# EAGLE board CT_schematic (EAGLE 7.6.0)

Size 100 x 80 mm. Coordinates in mm from the lower left corner, seen from the top.
Outline: 0,0 100,0 100,80 0,80 0,0
Copper layers (1*16): Top 0.035mm / dielectric 1.5mm / Bottom 0.035mm
Design rules "default": minimum track width 10mil, minimum drill 24mil, track to track 8mil, track to pad 8mil, pad to pad 8mil, via to via 8mil, smd to smd 8mil, copper to edge 40mil, drill to drill 8mil, minimum pad ring 10mil, minimum via ring 8mil, stop-mask expansion 4mil, vias tented up to drill 0mil, thermal gap 10mil

## Footprints (pad centres in the part's own frame; a part is rotated, then mirrored left to right if it is on the bottom)
C0603 = smd 0.8 x 0.8: 1 -0.762,0; 2 0.762,0
C0402 = smd 0.5 x 0.5: 1 -0.508,0; 2 0.508,0
C0805 = smd 1.2 x 1.3: 1 -1.016,0; 2 1.016,0
C1210 = smd 1.2 x 2.5: 1 -1.524,0; 2 1.524,0
EXV-9H = smd 3.505 x 1.676: 1 -2.857,0; 2 2.857,0
L0603 = smd 0.8 x 0.8: 1 -0.762,0; 2 0.762,0
L1210 = smd 1.2 x 2.5: 1 -1.524,0; 2 1.524,0
PJ-037B_PACKAGE = drill 3.7 square: 1 12,0 | drill 3.2 square: 2 6,0
R0603 = smd 0.8 x 0.8: 1 -0.762,0; 2 0.762,0
LQFP144 = smd 0.35 x 1.35: 1 -8.75,-10.625; 2 -8.25,-10.625; 3 -7.75,-10.625; 4 -7.25,-10.625; 5 -6.75,-10.625; 6 -6.25,-10.625; 7 -5.75,-10.625; 8 -5.25,-10.625; 9 -4.75,-10.625; 10 -4.25,-10.625; 11 -3.75,-10.625; 12 -3.25,-10.625; 13 -2.75,-10.62; 14 -2.25,-10.625; 15 -1.75,-10.625; 16 -1.25,-10.625; 17 -0.75,-10.625; 18 -0.25,-10.625; 19 0.25,-10.625; 20 0.75,-10.625; 21 1.25,-10.625; 22 1.75,-10.625; 23 2.25,-10.625; 24 2.75,-10.62; 25 3.25,-10.625; 26 3.75,-10.625; 27 4.25,-10.625; 28 4.75,-10.625; 29 5.25,-10.625; 30 5.75,-10.625; 31 6.25,-10.625; 32 6.75,-10.625; 33 7.25,-10.625; 34 7.75,-10.625; 35 8.25,-10.625; 36 8.75,-10.625; 73 8.75,10.625; 74 8.25,10.625; 75 7.75,10.625; 76 7.25,10.625; 77 6.75,10.625; 78 6.25,10.625; 79 5.75,10.625; 80 5.25,10.625; 81 4.75,10.625; 82 4.25,10.625; 83 3.75,10.625; 84 3.25,10.625; 85 2.75,10.625; 86 2.25,10.625; 87 1.75,10.625; 88 1.25,10.625; 89 0.75,10.625; 90 0.25,10.625; 91 -0.25,10.625; 92 -0.75,10.625; 93 -1.25,10.625; 94 -1.75,10.625; 95 -2.25,10.625; 96 -2.75,10.625; 97 -3.25,10.625; 98 -3.75,10.625; 99 -4.25,10.625; 100 -4.75,10.625; 101 -5.25,10.625; 102 -5.75,10.625; 103 -6.25,10.625; 104 -6.75,10.625; 105 -7.25,10.625; 106 -7.75,10.625; 107 -8.25,10.625; 108 -8.75,10.625 | smd 1.35 x 0.35: 37 10.625,-8.75; 38 10.625,-8.25; 39 10.625,-7.75; 40 10.625,-7.25; 41 10.625,-6.75; 42 10.625,-6.25; 43 10.625,-5.75; 44 10.625,-5.25; 45 10.625,-4.75; 46 10.625,-4.25; 47 10.625,-3.75; 48 10.625,-3.25; 49 10.625,-2.75; 50 10.625,-2.25; 51 10.625,-1.75; 52 10.625,-1.25; 53 10.625,-0.75; 54 10.625,-0.25; 55 10.625,0.25; 56 10.625,0.75; 57 10.625,1.25; 58 10.625,1.75; 59 10.625,2.25; 60 10.625,2.75; 61 10.625,3.25; 62 10.625,3.75; 63 10.625,4.25; 64 10.625,4.75; 65 10.625,5.25; 66 10.625,5.75; 67 10.625,6.25; 68 10.625,6.75; 69 10.625,7.25; 70 10.625,7.75; 71 10.625,8.25; 72 10.625,8.75; 109 -10.625,8.75; 110 -10.625,8.25; 111 -10.625,7.75; 112 -10.625,7.25; 113 -10.625,6.75; 114 -10.625,6.25; 115 -10.625,5.75; 116 -10.625,5.25; 117 -10.625,4.75; 118 -10.625,4.25; 119 -10.625,3.75; 120 -10.625,3.25; 121 -10.625,2.75; 122 -10.625,2.25; 123 -10.625,1.75; 124 -10.625,1.25; 125 -10.625,0.75; 126 -10.625,0.25; 127 -10.625,-0.25; 128 -10.625,-0.75; 129 -10.625,-1.25; 130 -10.625,-1.75; 131 -10.625,-2.25; 132 -10.625,-2.75; 133 -10.625,-3.25; 134 -10.625,-3.75; 135 -10.625,-4.25; 136 -10.625,-4.75; 137 -10.625,-5.25; 138 -10.625,-5.75; 139 -10.625,-6.25; 140 -10.625,-6.75; 141 -10.625,-7.25; 142 -10.625,-7.75; 143 -10.625,-8.25; 144 -10.625,-8.75
SOIC-8 = smd 1.6 x 0.6: 1 -2.7,1.905 | smd 1.55 x 0.6: 2 -2.7,0.635; 3 -2.7,-0.635; 4 -2.7,-1.905; 5 2.7,-1.905; 6 2.7,-0.635; 7 2.7,0.635; 8 2.7,1.905
SAMTEC_FTSH-105-01-L-DV-K = smd 0.762 x 2.794: 1 -2.54,-2.032; 2 -2.54,2.032; 3 -1.27,-2.032; 4 -1.27,2.032; 5 0,-2.032; 6 0,2.032; 7 1.27,-2.032; 8 1.27,2.032; 9 2.54,-2.032; 10 2.54,2.032
SSOP-20 = smd 1.651 x 0.432: 1 -3.48,2.925; 2 -3.48,2.275; 3 -3.48,1.625; 4 -3.48,0.975; 5 -3.48,0.325; 6 -3.48,-0.325; 7 -3.48,-0.975; 8 -3.48,-1.625; 9 -3.48,-2.275; 10 -3.48,-2.925; 11 3.48,-2.925; 12 3.48,-2.275; 13 3.48,-1.625; 14 3.48,-0.975; 15 3.48,-0.325; 16 3.48,0.325; 17 3.48,0.975; 18 3.48,1.625; 19 3.48,2.275; 20 3.48,2.925
182-009-MALE = drill 1.194 pad 1.524 octagon: 1 -5.537,10.923; 2 -2.769,10.923; 3 0,10.923; 4 2.769,10.923; 5 5.537,10.923; 6 -4.153,8.08; 7 -1.384,8.08; 8 1.384,8.08; 9 4.153,8.08 | hole 3.048: -12.446,9.501; 12.446,9.501
SSOP-28 = smd 1.5 x 0.4: 1 -3.625,4.225; 2 -3.625,3.575; 3 -3.625,2.925; 4 -3.625,2.275; 5 -3.625,1.625; 6 -3.625,0.975; 7 -3.625,0.325; 8 -3.625,-0.325; 9 -3.625,-0.975; 10 -3.625,-1.625; 11 -3.625,-2.275; 12 -3.625,-2.925; 13 -3.625,-3.575; 14 -3.625,-4.225; 15 3.625,-4.225; 16 3.625,-3.575; 17 3.625,-2.925; 18 3.625,-2.275; 19 3.625,-1.625; 20 3.625,-0.975; 21 3.625,-0.325; 22 3.625,0.325; 23 3.625,0.975; 24 3.625,1.625; 25 3.625,2.275; 26 3.625,2.925; 27 3.625,3.575; 28 3.625,4.225
TH58NVG3S0HBAI4 = smd 0.46 x 0.46: A1 -5.6,2.4; A2 -5.6,1.6; A9 -5.6,-5.6; A10 -5.6,-6.4; B1 -4.8,2.4; B9 -4.8,-5.6; B10 -4.8,-6.4; C3 -4,0.8; C4 -3.2,0.8; C5 -2.4,0.8; C6 -1.6,0.8; C7 -0.8,0.8; C8 0,0.8; D3 -4,0; D4 -3.2,0; D5 -2.4,0; D6 -1.6,0; D7 -0.8,0; D8 0,0; E3 -4,-0.8; E4 -3.2,-0.8; E5 -2.4,-0.8; E6 -1.6,-0.8; E7 -0.8,-0.8; E8 0,-0.8; F3 -4,-1.6; F4 -3.2,-1.6; F5 -2.4,-1.6; F6 -1.6,-1.6; F7 -0.8,-1.6; F8 0,-1.6; G3 -4,-2.4; G4 -3.2,-2.4; G5 -2.4,-2.4; G6 -1.6,-2.4; G7 -0.8,-2.4; G8 0,-2.4; H3 -4,-3.2; H4 -3.2,-3.2; H5 -2.4,-3.2; H6 -1.6,-3.2; H7 -0.8,-3.2; H8 0,-3.2; J3 -4,-4; J4 -3.2,-4; J5 -2.4,-4; J6 -1.6,-4; J7 -0.8,-4; J8 0,-4; K3 -4,-4.8; K4 -3.2,-4.8; K5 -2.4,-4.8; K6 -1.6,-4.8; K7 -0.8,-4.8; K8 0,-4.8; L1 0.8,2.4; L2 0.8,1.6; L9 0.8,-5.6; L10 0.8,-6.4; M1 1.6,2.4; M2 1.6,1.6; M9 1.6,-5.6; M10 1.6,-6.4
ABLS-25.000MHZ-B2F-T = smd 5.6 x 2.8: 1 -3.81,0; 2 5.69,0
ASEK = smd 1.4 x 1: 1 -1.1,-0.8; 2 1.1,-0.8; 3 1.1,0.8; 4 -1.1,0.8
WSON-8 = smd 0.3 x 0.6: 1 -0.75,0; 2 0.05,0; 3 0.85,0; 4 1.65,0; 5 1.65,3.8; 6 0.85,3.8; 7 0.05,3.8; 8 -0.75,3.8 | smd 3 x 2.6: PAD 0.45,1.9
SON-6 = smd 0.55 x 0.3: 1 -0.355,0.5 | smd 0.52 x 0.3: 2 -0.37,0; 3 -0.37,-0.5; 4 0.37,-0.5; 5 0.37,0; 6 0.37,0.5
SW_4-1437565-2 = smd 1.4 x 2.1: 1 -2.23,4.55; 2 -2.23,-4.55; 3 2.23,4.55; 4 2.23,-4.55
LGM67K-G1J2-24-Z = smd 0.8 x 1.4: A -2,0; C 0,0
NC7SZ125M5X = smd 1.3 x 0.7: 1 -1.3,0.95; 2 -1.3,0; 3 -1.3,-0.95; 4 1.3,-0.95; 5 1.3,0.95

## Placement (x,y rotation side)
C1  1e-06  [C0603]  -19.05,93.98 0 top  (outside the outline)
C2  1e-07  [C0603]  -22.86,93.98 0 top  (outside the outline)
C3  1e-07  [C0603]  -26.67,93.98 0 top  (outside the outline)
C4  1e-07  [C0603]  -30.48,93.98 0 top  (outside the outline)
C5  1e-07  [C0603]  -34.29,93.98 0 top  (outside the outline)
C6  1e-07  [C0603]  -38.1,93.98 0 top  (outside the outline)
C7  1e-07  [C0603]  -41.91,93.98 0 top  (outside the outline)
C8  1e-07  [C0603]  -45.72,93.98 0 top  (outside the outline)
C9  1e-07  [C0603]  -49.53,93.98 0 top  (outside the outline)
C10  1e-07  [C0603]  -53.34,93.98 0 top  (outside the outline)
C11  1e-07  [C0603]  -57.15,93.98 0 top  (outside the outline)
C12  1e-07  [C0603]  -60.96,93.98 0 top  (outside the outline)
C13  1e-07  [C0603]  -64.77,93.98 0 top  (outside the outline)
C14  4.7e-06  [C0603]  -15.24,93.98 0 top  (outside the outline)
C15  1e-08  [C0603]  -68.58,93.98 0 top  (outside the outline)
C16  1e-08  [C0603]  -72.39,93.98 0 top  (outside the outline)
C17  1e-06  [C0603]  -76.2,93.98 0 top  (outside the outline)
C18  1e-11  [C0402]  -41.91,99.06 0 top  (outside the outline)
C19  1e-11  [C0402]  -45.72,99.06 0 top  (outside the outline)
C20  1e-08  [C0402]  -49.53,99.06 0 top  (outside the outline)
C21  1e-07  [C0402]  -53.34,99.06 0 top  (outside the outline)
C22  1e-06  [C0603]  -80.01,93.98 0 top  (outside the outline)
C23  1e-06  [C0603]  -83.82,93.98 0 top  (outside the outline)
C24  1e-06  [C0603]  -87.63,93.98 0 top  (outside the outline)
C25  4.7e-06  [C0805]  -46.99,82.55 0 top  (outside the outline)
C26  1e-07  [C0402]  -57.15,99.06 0 top  (outside the outline)
C27  1e-07  [C0402]  -60.96,99.06 0 top  (outside the outline)
C28  1e-07  [C0402]  -64.77,99.06 0 top  (outside the outline)
C29  1e-07  [C0402]  -68.58,99.06 0 top  (outside the outline)
C30  1e-07  [C0402]  -72.39,99.06 0 top  (outside the outline)
C31  1e-05  [C0805]  -52.07,82.55 0 top  (outside the outline)
C32  1e-07  [C0402]  -76.2,99.06 0 top  (outside the outline)
C33  1e-07  [C0402]  -80.01,99.06 0 top  (outside the outline)
C34  1e-08  [C0402]  -83.82,99.06 0 top  (outside the outline)
C35  1e-08  [C0402]  -87.63,99.06 0 top  (outside the outline)
C36  1e-05  [C1210]  -16.51,83.82 0 top  (outside the outline)
C37  1e-05  [C1210]  -22.86,83.82 0 top  (outside the outline)
C38  1e-07  [C0402]  -15.24,104.14 0 top  (outside the outline)
C39  0.0001  [EXV-9H]  -38.1,76.2 0 top  (outside the outline)
C40  0.0001  [EXV-9H]  -49.53,76.2 0 top  (outside the outline)
C41  1e-08  [C0402]  -19.05,104.14 0 top  (outside the outline)
C42  1e-08  [C0402]  -22.86,104.14 0 top  (outside the outline)
F1  240.0  [L0603]  -15.24,99.06 0 top  (outside the outline)
I1  1.5e-05  [L1210]  -29.21,83.82 0 top  (outside the outline)
J1  PJ-037B  [PJ-037B_PACKAGE]  -74.93,52.07 0 top  (outside the outline)
R2  1000.0  [R0603]  -19.05,99.06 0 top  (outside the outline)
R4  4700.0  [R0603]  -22.86,99.06 0 top  (outside the outline)
R5  10000.0  [R0603]  -15.24,88.9 0 top  (outside the outline)
R6  10000.0  [R0603]  -20.32,88.9 0 top  (outside the outline)
R7  10000.0  [R0603]  -25.4,88.9 0 top  (outside the outline)
R8  10000.0  [R0603]  -30.48,88.9 0 top  (outside the outline)
R9  10000.0  [R0603]  -35.56,88.9 0 top  (outside the outline)
R10  10000.0  [R0603]  -40.64,88.9 0 top  (outside the outline)
R11  10000.0  [R0603]  -45.72,88.9 0 top  (outside the outline)
R12  10000.0  [R0603]  -50.8,88.9 0 top  (outside the outline)
R13  5.0  [R0603]  -26.67,99.06 0 top  (outside the outline)
R14  100000.0  [R0603]  -57.15,82.55 0 top  (outside the outline)
R15  100000.0  [R0603]  -62.23,82.55 0 top  (outside the outline)
R16  100000.0  [R0603]  -67.31,82.55 0 top  (outside the outline)
R17  100000.0  [R0603]  -72.39,82.55 0 top  (outside the outline)
R18  10000.0  [R0603]  -55.88,88.9 0 top  (outside the outline)
R19  10000.0  [R0603]  -60.96,88.9 0 top  (outside the outline)
R20  10000.0  [R0603]  -66.04,88.9 0 top  (outside the outline)
R21  10000.0  [R0603]  -71.12,88.9 0 top  (outside the outline)
R22  10000.0  [R0603]  -76.2,88.9 0 top  (outside the outline)
R23  100000.0  [R0603]  -77.47,82.55 0 top  (outside the outline)
R24  2231.0  [R0603]  -30.48,99.06 0 top  (outside the outline)
R25  1000.0  [R0603]  -34.29,99.06 0 top  (outside the outline)
R26  10000.0  [R0603]  -81.28,88.9 0 top  (outside the outline)
R27  10000.0  [R0603]  -86.36,88.9 0 top  (outside the outline)
R28  9100.0  [R0603]  -38.1,99.06 0 top  (outside the outline)
R29  680000.0  [R0603]  -82.55,82.55 0 top  (outside the outline)
R30  120000.0  [R0603]  -87.63,82.55 0 top  (outside the outline)
U1  STM32F101ZGTx  [LQFP144]  -24.13,11.43 0 top  (outside the outline)
U2  AT25128B-SSHL-T  [SOIC-8]  -44.45,64.77 0 top  (outside the outline)
U3  FTSH-105-01-L-DV-K  [SAMTEC_FTSH-105-01-L-DV-K]  -35.56,53.34 0 top  (outside the outline)
U4  MAX3218EAP+T  [SSOP-20]  -54.61,64.77 0 top  (outside the outline)
U5  182-009-113R531  [182-009-MALE]  -59.69,6.35 0 top  (outside the outline)
U6  ST3241EBPR  [SSOP-28]  -58.42,30.48 0 top  (outside the outline)
U7  182-009-113R531  [182-009-MALE]  -36.83,29.21 0 top  (outside the outline)
U8  TH58NVG3S0HBAI4  [TH58NVG3S0HBAI4]  -53.34,54.61 0 top  (outside the outline)
U9  ABLS-25.000MHZ-B2F-T  [ABLS-25.000MHZ-B2F-T]  -68.58,76.2 0 top  (outside the outline)
U10  ASEK-32.768KHz-ECST  [ASEK]  -29.21,76.2 0 top  (outside the outline)
U11  LP3878SDX-ADJ/NOPB  [WSON-8]  -77.47,63.5 0 top  (outside the outline)
U12  TPS3895ADRYR  [SON-6]  -25.4,102.87 0 top  (outside the outline)
U13  4-1437565-2  [SW_4-1437565-2]  -27.94,66.04 0 top  (outside the outline)
U14  Q65110A2395  [LGM67K-G1J2-24-Z]  -80.01,74.93 0 top  (outside the outline)
U15  nc7sz125m5x  [NC7SZ125M5X]  -34.29,82.55 0 top  (outside the outline)
U16  nc7sz125m5x  [NC7SZ125M5X]  -40.64,82.55 0 top  (outside the outline)

## Library data of the parts
C1-C42 F1 I1 J1 R2 R4-R30 U1-U16 = circuit_tree

## Nets
CLK_CRYSTAL_U1_23: C18.1 U1.23 U9.1
CLK_CRYSTAL_U1_24: C19.1 U1.24 U9.2
CLK_U1_8: U1.8 U10.3
GND: C1.2 C2.2 C3.2 C4.2 C5.2 C6.2 C7.2 C8.2 C9.2 C10.2 C11.2 C12.2 C13.2 C14.2 C15.2 C16.2 C17.2 C18.2 C19.2 C20.2 C21.2 C22.2 C23.2 C24.2 C26.2 C29.2 C30.2 C31.2 C32.2 C33.2 C34.2 C35.2 C36.2 C37.2 C38.2 C39.2 C40.2 C41.2 C42.2 J1.2 R2.2 R5.2 R12.2 R13.2 R25.2 R28.2 R30.2 U1.16 U1.30 U1.31 U1.38 U1.51 U1.61 U1.71 U1.83 U1.94 U1.107 U1.120 U1.130 U1.143 U2.4 U3.3 U3.5 U4.5 U4.17 U4.20 U5.5 U6.23 U6.25 U7.5 U8.C5 U8.K3 U8.K8 U10.2 U11.3 U11.PAD U12.2 U14.C U15.2 U15.3 U16.1 U16.3
NET_U1_25: R4.1 U1.25 U16.4
NET_U1_33: C15.1 C16.1 C17.1 F1.1 U1.32 U1.33
NET_U1_138: R5.1 U1.138
NET_U1_141: U14.A
NET_U1_142: U13.3 U13.4
NET_U2_3: R6.1 U2.3
NET_U2_7: R8.1 U2.7
NET_U3_2: R11.1 U3.2
NET_U3_9: R13.1 U3.9
NET_U4_1: I1.1 U4.1
NET_U4_2: R14.1 U4.2
NET_U4_3: R15.1 U4.3
NET_U4_4: R16.1 U4.4
NET_U4_15: C24.1 U4.15
NET_U4_16: C25.2 U4.16
NET_U4_18: C25.1 U4.18
NET_U4_19: C23.1 U4.19
NET_U5_2: U4.12 U5.2
NET_U5_3: U4.14 U5.3
NET_U5_7: U4.11 U5.7
NET_U5_8: U4.13 U5.8
NET_U6_1: C28.1 U6.1
NET_U6_2: C28.2 U6.2
NET_U6_3: C30.1 U6.3
NET_U6_22: R17.1 U6.22
NET_U6_24: C27.2 U6.24
NET_U6_27: C29.1 U6.27
NET_U6_28: C27.1 U6.28
NET_U7_2: U6.4 U7.2
NET_U7_3: U6.9 U7.3
NET_U7_7: U6.5 U7.7
NET_U7_8: U6.10 U7.8
NET_U8_C3: R21.1 U8.C3
NET_U8_C8: R22.1 U8.C8
NET_U11_1: C35.1 U11.1
NET_U11_6: R24.2 R25.1 U11.6
NET_U11_8: R23.1 U11.8
NET_U12_1: R27.1 R28.1 U12.1
NET_U12_3: R29.2 R30.1 U12.3
NET_U12_4: R26.1 U12.4 U15.4 U16.2
NET_U13_1: R2.1 U13.1 U13.2
PROC_FSMC_D0: U1.85 U8.H4
PROC_FSMC_D1: U1.86 U8.J4
PROC_FSMC_D2: U1.114 U8.K4
PROC_FSMC_D3: U1.115 U8.K5
PROC_FSMC_D4: U1.58 U8.K6
PROC_FSMC_D5: U1.59 U8.J7
PROC_FSMC_D6: U1.60 U8.K7
PROC_FSMC_D7: U1.63 U8.J8
PROC_FSMC_NCE2: R18.1 U1.123 U8.C6
PROC_FSMC_NOE: R19.1 U1.118 U8.D4
PROC_FSMC_NWE: R20.1 U1.119 U8.C7
PROC_SPI1_MISO: U1.42 U2.2
PROC_SPI1_MOSI: U1.43 U2.5
PROC_SPI1_NSS: R7.1 U1.40 U2.1
PROC_SPI1_SCK: U1.41 U2.6
PROC_SYS_JTDI: R10.1 U1.110 U3.8
PROC_SYS_JTDO_TRACESWO: U1.133 U3.6
PROC_SYS_TRACECLK: R12.1 U1.1 U3.4
PROC_UART4_RX: U1.112 U4.9
PROC_UART4_TX: U1.111 U4.7
PROC_UART5_RX: U1.116 U6.19
PROC_UART5_TX: U1.113 U6.14
RST_OUT_U3_JTAG_RST_B: R9.1 U3.10 U15.1
VCC_S1_14V8: C36.1 C39.1 C40.1 J1.1 R23.2 U11.4
VCC_TIER1_3V3: C1.1 C2.1 C3.1 C4.1 C5.1 C6.1 C7.1 C8.1 C9.1 C10.1 C11.1 C12.1 C13.1 C14.1 C20.1 C21.1 C22.1 C26.1 C31.1 C32.1 C33.1 C34.1 C37.1 C38.1 C41.1 C42.1 F1.2 I1.2 R4.2 R6.2 R7.2 R8.2 R9.2 R10.2 R11.2 R14.2 R15.2 R16.2 R17.2 R18.2 R19.2 R20.2 R21.2 R22.2 R24.1 R26.2 R27.2 R29.1 U1.6 U1.17 U1.39 U1.52 U1.62 U1.72 U1.84 U1.95 U1.108 U1.121 U1.131 U1.144 U2.8 U3.1 U4.6 U6.26 U8.H8 U8.J6 U10.4 U11.5 U12.6 U15.5 U16.5

## Tracks (layer width: path | path; a pad name or v marks a point on that pad's centre or on a via)
CLK_CRYSTAL_U1_23  (2 unrouted)
CLK_CRYSTAL_U1_24  (2 unrouted)
CLK_U1_8  (1 unrouted)
GND  (81 unrouted)
NET_U1_25  (2 unrouted)
NET_U1_33  (5 unrouted)
NET_U1_138  (1 unrouted)
NET_U1_142  (1 unrouted)
NET_U2_3  (1 unrouted)
NET_U2_7  (1 unrouted)
NET_U3_2  (1 unrouted)
NET_U3_9  (1 unrouted)
NET_U4_1  (1 unrouted)
NET_U4_2  (1 unrouted)
NET_U4_3  (1 unrouted)
NET_U4_4  (1 unrouted)
NET_U4_15  (1 unrouted)
NET_U4_16  (1 unrouted)
NET_U4_18  (1 unrouted)
NET_U4_19  (1 unrouted)
NET_U5_2  (1 unrouted)
NET_U5_3  (1 unrouted)
NET_U5_7  (1 unrouted)
NET_U5_8  (1 unrouted)
NET_U6_1  (1 unrouted)
NET_U6_2  (1 unrouted)
NET_U6_3  (1 unrouted)
NET_U6_22  (1 unrouted)
NET_U6_24  (1 unrouted)
NET_U6_27  (1 unrouted)
NET_U6_28  (1 unrouted)
NET_U7_2  (1 unrouted)
NET_U7_3  (1 unrouted)
NET_U7_7  (1 unrouted)
NET_U7_8  (1 unrouted)
NET_U8_C3  (1 unrouted)
NET_U8_C8  (1 unrouted)
NET_U11_1  (1 unrouted)
NET_U11_6  (2 unrouted)
NET_U11_8  (1 unrouted)
NET_U12_1  (2 unrouted)
NET_U12_3  (2 unrouted)
NET_U12_4  (3 unrouted)
NET_U13_1  (2 unrouted)
PROC_FSMC_D0  (1 unrouted)
PROC_FSMC_D1  (1 unrouted)
PROC_FSMC_D2  (1 unrouted)
PROC_FSMC_D3  (1 unrouted)
PROC_FSMC_D4  (1 unrouted)
PROC_FSMC_D5  (1 unrouted)
PROC_FSMC_D6  (1 unrouted)
PROC_FSMC_D7  (1 unrouted)
PROC_FSMC_NCE2  (2 unrouted)
PROC_FSMC_NOE  (2 unrouted)
PROC_FSMC_NWE  (2 unrouted)
PROC_SPI1_MISO  (1 unrouted)
PROC_SPI1_MOSI  (1 unrouted)
PROC_SPI1_NSS  (2 unrouted)
PROC_SPI1_SCK  (1 unrouted)
PROC_SYS_JTDI  (2 unrouted)
PROC_SYS_JTDO_TRACESWO  (1 unrouted)
PROC_SYS_TRACECLK  (2 unrouted)
PROC_UART4_RX  (1 unrouted)
PROC_UART4_TX  (1 unrouted)
PROC_UART5_RX  (1 unrouted)
PROC_UART5_TX  (1 unrouted)
RST_OUT_U3_JTAG_RST_B  (2 unrouted)
VCC_S1_14V8  (5 unrouted)
VCC_TIER1_3V3  (70 unrouted)